# EAGLE board Starter Breadboard (EAGLE 9.7.0)

Size 115 x 47.4 mm. Coordinates in mm from the lower left corner, seen from the top.
Outline: 0,0 115,0 115,47.4 0,47.4 0,0
Copper layers (1*16): Top 0.035mm / dielectric 1.5mm / Bottom 0.035mm
Design rules "default": minimum track width 6mil, minimum drill 0.35mm, track to track 6mil, track to pad 6mil, pad to pad 6mil, via to via 6mil, smd to smd 6mil, copper to edge 40mil, drill to drill 6mil, minimum pad ring 10mil, minimum via ring 8mil, stop-mask expansion 4mil, vias tented up to drill 0mil, thermal gap 10mil

## Footprints (pad centres in the part's own frame; a part is rotated, then mirrored left to right if it is on the bottom)
BATTERY-GENERIC = drill 1.118 pad 3.15 octagon: + 2.54,0; - -2.54,0
SENRD254W50D503H320B = drill 0.7 pad 1.3: 1 -1.27,0; 2 1.27,0
RESAD1016W63L850D250B = drill 0.83 pad 1.43: 1 -5.08,0; 2 5.08,0
HA-06-SM065 = drill 1 pad 1.676: 1 -2.54,-2.54; 2 0,2.54; 3 2.54,-2.54
GL5528 = drill 0.8 pad 1.4: 1 -1.702,0; 2 1.702,0
SWITCH-MOMENTARY-PTH-6.5MM = drill 1.016 pad 1.88: 1 -3.251,2.261; 2 3.251,2.261; 3 -3.251,-2.261; 4 3.251,-2.261
TO92 = drill 0.813 octagon: 1 -1.27,0; 2 0,1.905; 3 1.27,0

## Placement (x,y rotation side)
P1  BATTERYGENERIC  [BATTERY-GENERIC]  8.26,8.26 180 top
Q1  PHOTOTRANSISTOR  [SENRD254W50D503H320B]  63.5,15.57 180 top
R5  2.6k  [RESAD1016W63L850D250B]  49.53,38.43 90 top
R6  10k  [RESAD1016W63L850D250B]  62.23,38.43 90 top
R7  3k  [RESAD1016W63L850D250B]  74.93,38.43 90 top
RPOT1  400k  [HA-06-SM065]  107.95,13.03 0 top
RPR  PHOTOCELL_GL5528  [GL5528]  50.8,13.03 0 top
S1  SWITCH_MOMENTARY  [SWITCH-MOMENTARY-PTH-6.5MM]  77.47,21.92 90 top
U1  TMP36GT9Z_TO92  [TO92]  90.17,25.73 0 top

## Library data of the parts
P1 Q1 R5-R7 RPOT1 RPR S1 U1 = Tinkercad

## Nets
P1+: P1.+ R5.2 R6.2 R7.2 RPOT1.3 U1.3
P1-: P1.- Q1.1 RPOT1.1 RPR.2 S1.3 S1.4 U1.1
Q1_C: Q1.2 R6.1
R5_1: R5.1 RPR.1
S1_2: R7.1 S1.1 S1.2

## Tracks (layer width: path | path; a pad name or v marks a point on that pad's centre or on a via)
P1+  (5 unrouted)
P1-  (6 unrouted)
Q1_C  (1 unrouted)
R5_1  (1 unrouted)
S1_2  (2 unrouted)